# Altium PCB GCMProtoPCB.PcbDoc
Units mm, origin at the board's own origin, x right, y up, seen from the top; angles counter-clockwise.
Board outline 76 x 65.1 mm, 2 copper layers (Top Layer, Bottom Layer); 39 components, 40 nets, 181 pads, 40 vias.
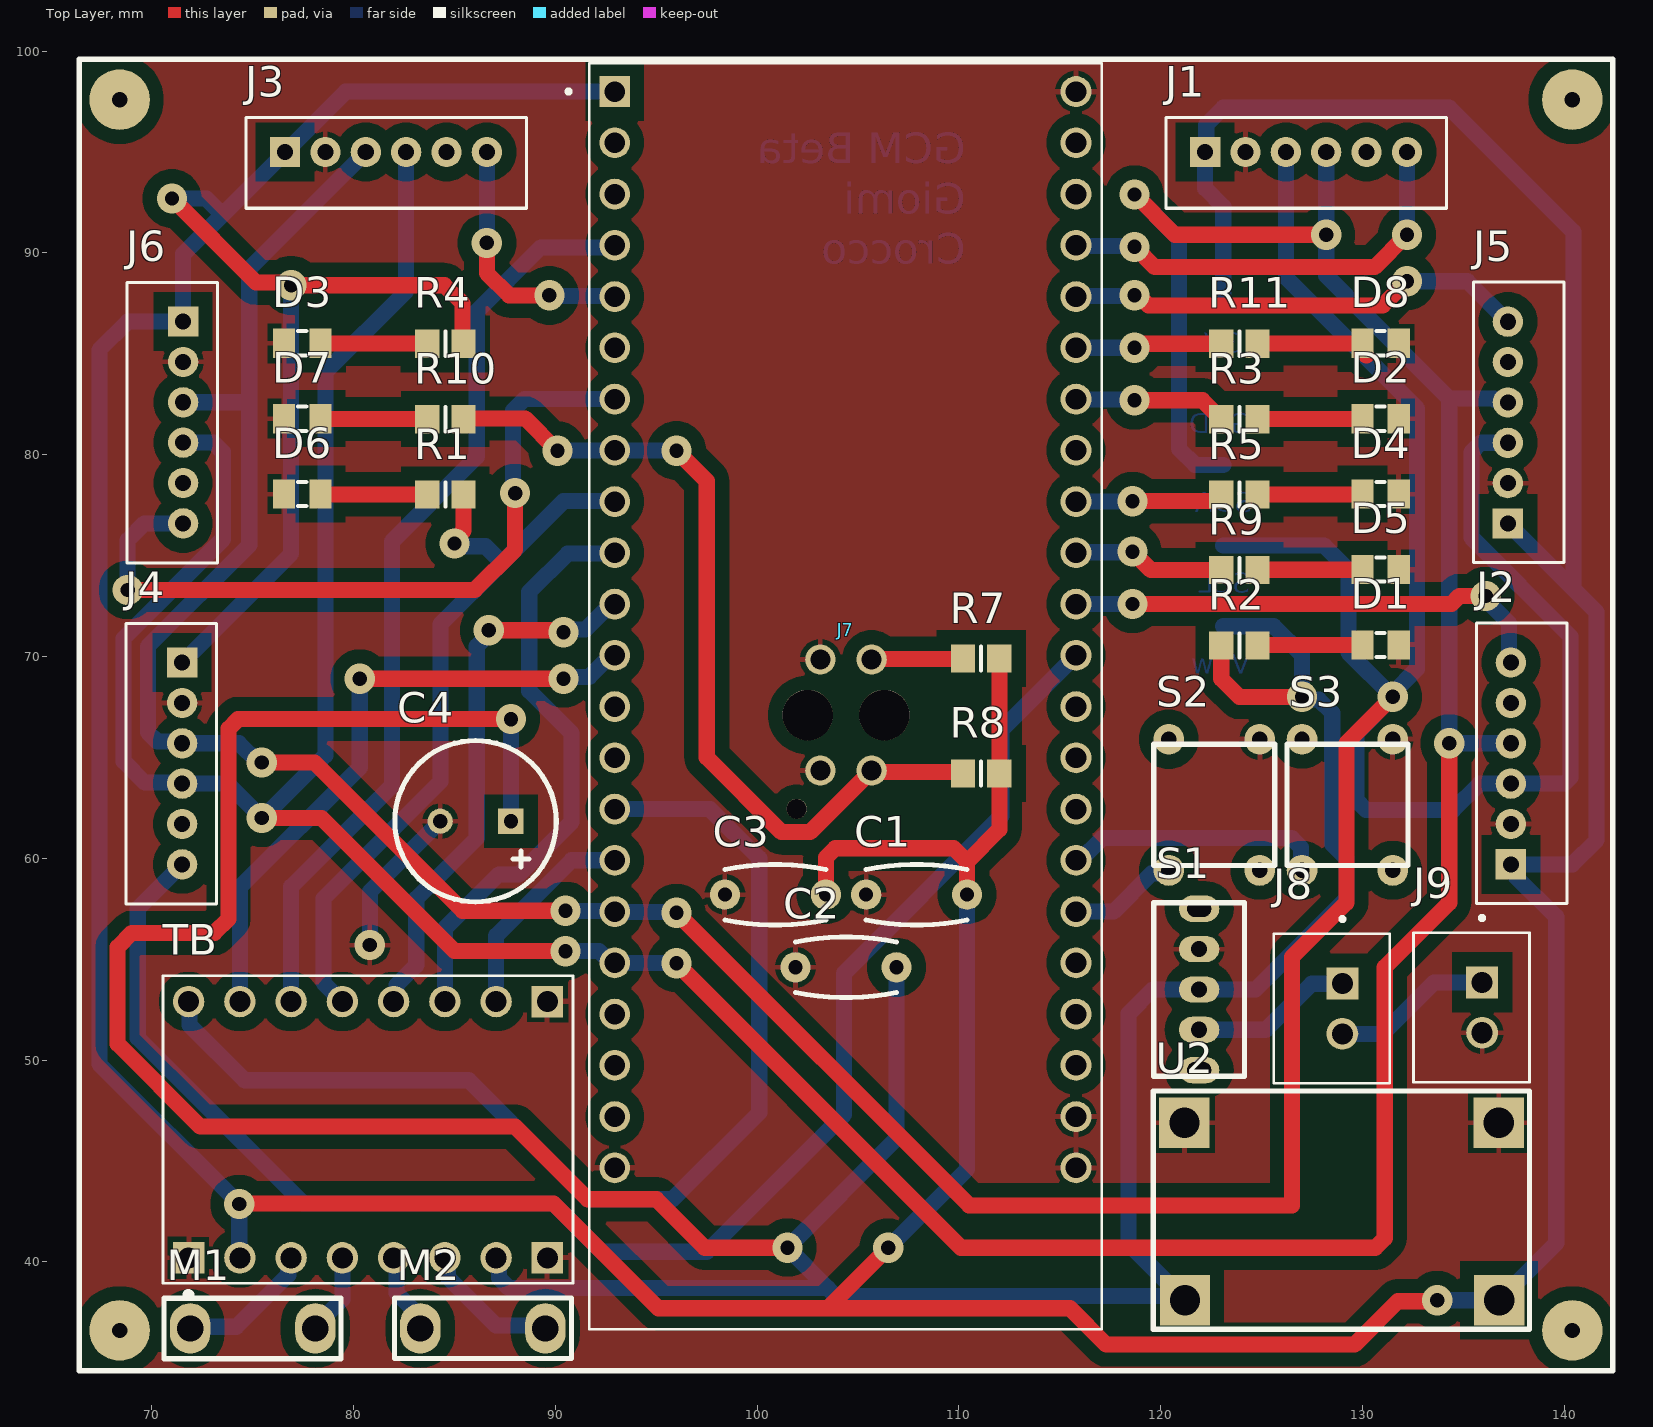
[diagram p0: Top Layer view]
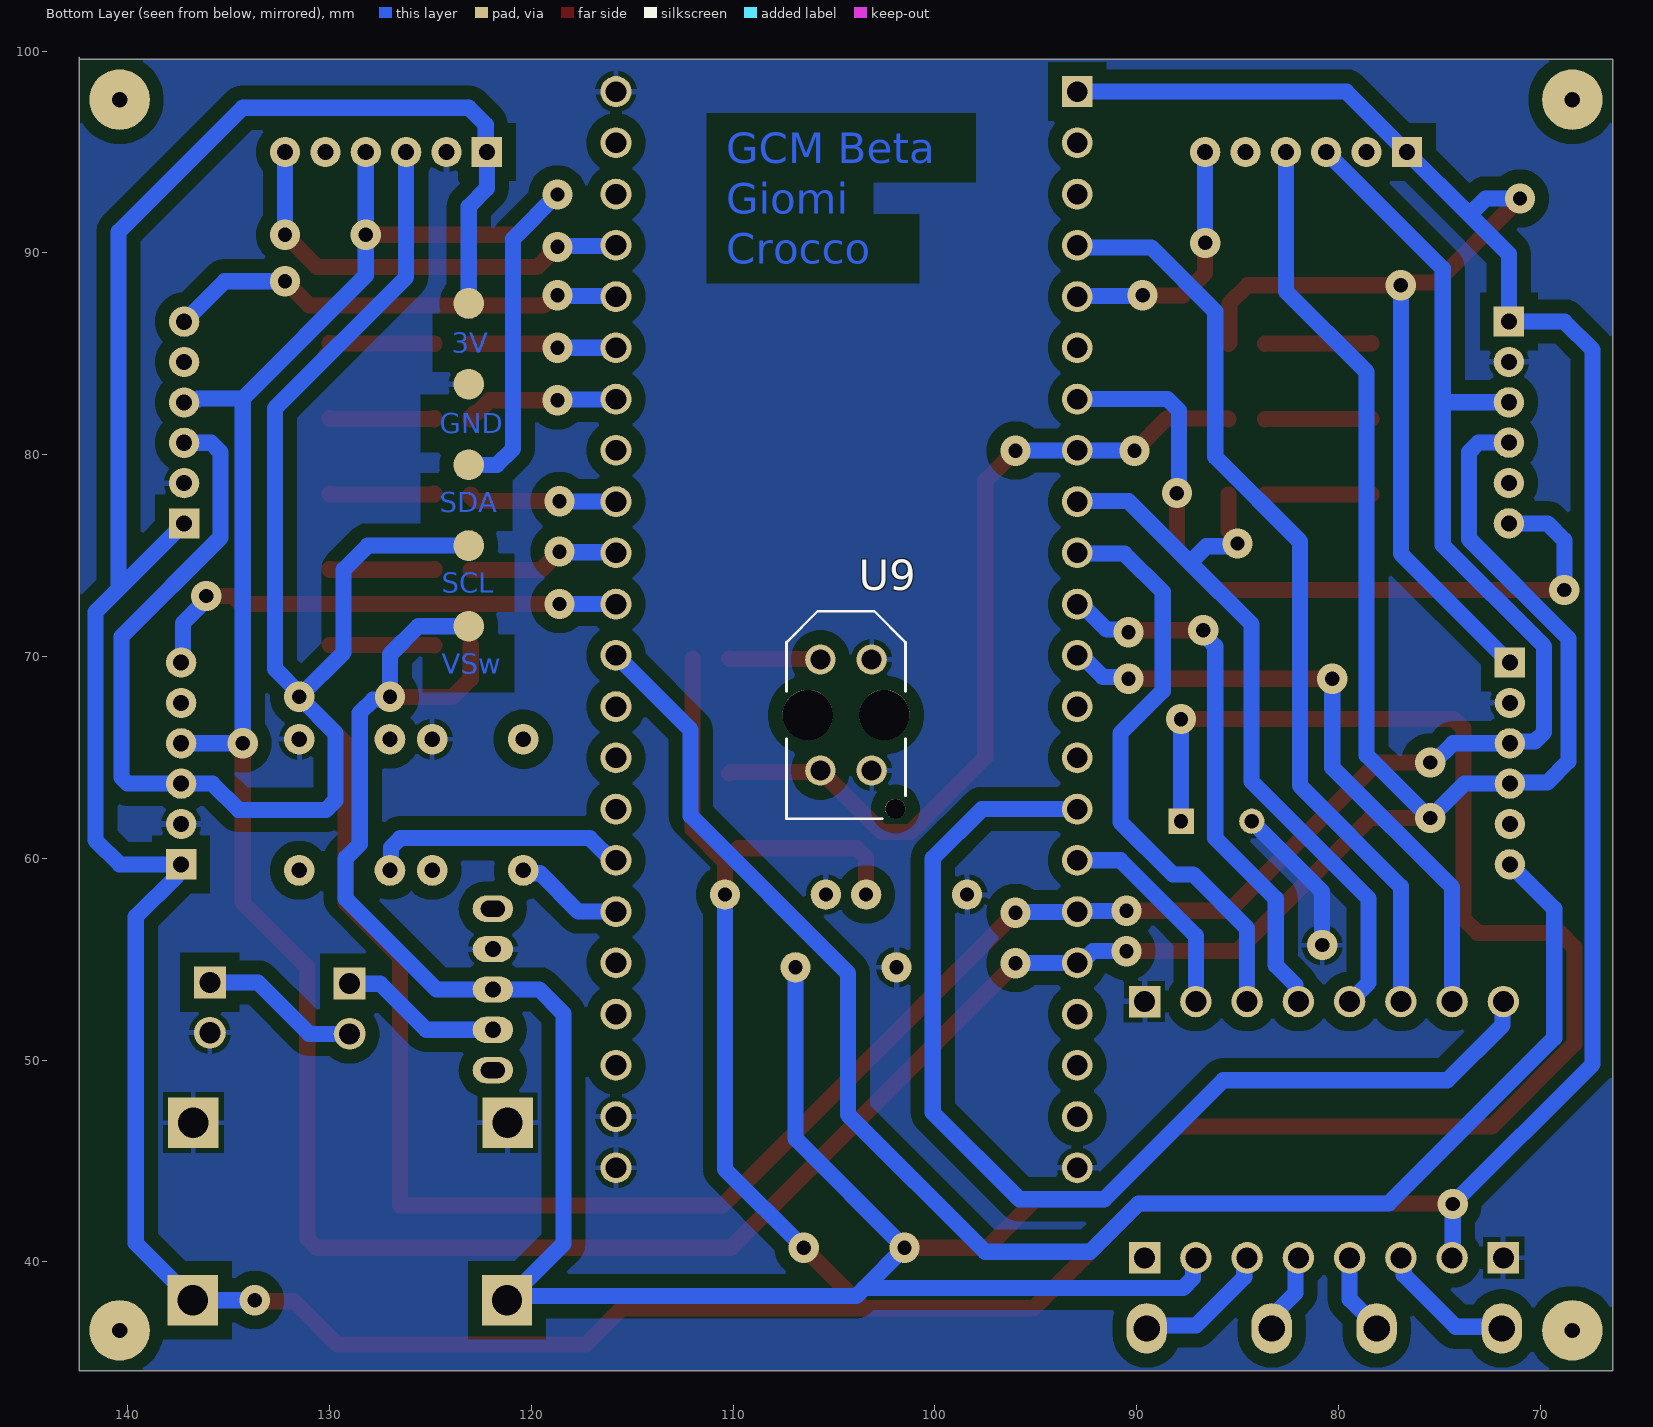
[diagram p1: Bottom Layer view, seen from below]

## Layer stack, top to bottom
Top Solder: solder mask 0.0102, Solder Resist, Dk 3.5
Top Layer: signal copper 0.0356
Dielectric 1: dielectric 0.32, FR-4, Dk 4.8
Bottom Layer: signal copper 0.0356
Bottom Solder: solder mask 0.0102, Solder Resist, Dk 3.5

## Board outline
66.4,34.6 142.4,34.6 142.4,34.7 142.4,99.7 142.4,99.6 66.4,99.6

## Design rules (kind name [scope] priority, off if disabled: settings)
Clearance Polygon [InPolygon] p1: gap=0.7 ignorepadtopadclearanceinfootprint=TRUE
Clearance [All] p2: gap=0.254 ignorepadtopadclearanceinfootprint=FALSE except(0: Arc-Hole Track-Hole SMDPad-Hole THPad-Hole Via-Hole Fill-Hole Poly-Hole Region-Hole Text-Hole)
PolygonConnect [All] p1: connectstyle=Relief reliefconductorwidth=0.254 reliefentries=4 polygonreliefangle="90 Angle" airgapwidth=0.254
RoutingVias [All] p1: holewidth=0.711 width=1.5 viastyle="Through Hole" minholewidth=0.711 minwidth=1.5 maxholewidth=0.711 maxwidth=1.5
SolderMaskExpansion [All] p1: expansion=0.102 istentingtop=FALSE
Width [All] p1: maxlimit=1 minlimit=0.7 preferedwidth=0.8
30 further rules are at their usual default settings.

## Components (designator, comment, footprint, x,y, rotation, side; value= is the part's Value field where it differs from the comment)
C1 "Cap Ceramico" "Cap Ceramico" 107.9,58.2 r0 top
C2 "100nf" "Cap Ceramico" 104.4,54.6 r180 top
C3 "Cap Ceramico" "Cap Ceramico" 100.9,58.2 r0 top
C4 "220 uF" "Cap El 220 uF" 86.3,61.947 r180 top
D1 "LED SMD" "LED SMD" 130.893,70.575 r180 top
D2 "LED SMD" "LED SMD" 130.893,81.787 r180 top
D3 "LED SMD" "LED SMD" 77.45,85.525 r0 top
D4 "LED SMD" "LED SMD" 130.893,78.05 r180 top
D5 "LED SMD" "LED SMD" 130.893,74.312 r180 top
D6 "LED SMD" "LED SMD" 77.45,78.05 r0 top
D7 "LED SMD" "LED SMD" 77.45,81.787 r0 top
D8 "LED SMD" "LED SMD" 130.893,85.525 r180 top
J1 "B6B-PH-K-S(LF)(SN)" JST_B6B-PH-K-S(LF)(SN) 127.2,94.45 r180 top
J2 "B6B-PH-K-S(LF)(SN)" JST_B6B-PH-K-S(LF)(SN) 137.9,64.7 r270 top
J3 "B6B-PH-K-S(LF)(SN)" JST_B6B-PH-K-S(LF)(SN) 81.6,94.45 r180 top
J4 "B6B-PH-K-S(LF)(SN)" JST_B6B-PH-K-S(LF)(SN) 70.95,64.7 r90 top
J5 "B6B-PH-K-S(LF)(SN)" JST_B6B-PH-K-S(LF)(SN) 137.75,81.594 r270 top
J6 "B6B-PH-K-S(LF)(SN)" JST_B6B-PH-K-S(LF)(SN) 71,81.6 r90 top
J7 "ESP32-S3-DEVKITC-1-N8R8" ESP32-S3-DEVKITC-1-N8R8 104.37,68.03 r0 top
J8 "B2B-XH-A" JST_B2B-XH-A 128.475,52.55 r90 top
J9 "B2B-XH-A" JST_B2B-XH-A 135.4,52.6 r90 top
M1 "" MOTOR 71.9,36.7 r0 top
M2 "" MOTOR 89.5,36.7 r180 top
R1 "150Ω" "RESISTENCIA SMD" 84.543,78.025 r180 top value=3KΩ
R2 "470Ω" "RESISTENCIA SMD" 123.9,70.55 r0 top value=3KΩ
R3 "150Ω" "RESISTENCIA SMD" 123.9,81.762 r0 top value=3KΩ
R4 "150Ω" "RESISTENCIA SMD" 84.543,85.5 r180 top value=3KΩ
R5 "150Ω" "RESISTENCIA SMD" 123.9,78.025 r0 top value=3KΩ
R7 "150Ω" "RESISTENCIA SMD" 111.1,69.9 r180 top value=3KΩ
R8 "3.3kΩ" "RESISTENCIA SMD" 111.1,64.2 r0 top value=3KΩ
R9 "150Ω" "RESISTENCIA SMD" 123.9,74.287 r0 top value=3KΩ
R10 "47Ω" "RESISTENCIA SMD" 84.543,81.763 r180 top value=3KΩ
R11 "150Ω" "RESISTENCIA SMD" 123.9,85.5 r0 top value=3KΩ
S1 "" "Slide Switch" 121.9,53.5 r90 top
S2 "" Pulsador 119.65,65.65 r90 top
S3 "" Pulsador 126.25,65.65 r90 top
TB "POLOLU-713" SHIELD_POLOLU-713 80.71,46.55 r90 top
U2 "Step-Down Mini360" Step-Down 128.668,42.5 r0 top
U9 "" OPTO_TCRT5000 104.4,67.1 r90 bottom

## Footprints (in the part's own frame and the unit in brackets; to place one, negate y for a bottom-side part, rotate by r counter-clockwise, add the part's x,y. Pads: shape width x height; smd on the part's side, far side on the other; paste and mask are expansions set on the pad)
"Cap Ceramico" [mm]
  round 1.5 hole 0.7: 1(-2.5,0) 2(2.5,0)
  silkscreen extent -2.5,-1.5 2.5,1.5
"Cap El 220 uF" [mm]
  rect 1.25x1.25 hole 0.7: 1(-1.49,0.11)
  round 1.25 hole 0.7: 2(2.01,0.11)
  silkscreen extent -3.74,-3.89 4.26,4.11, body extent -3.71,-3.95 4.29,4.05, height 1.27
ESP32-S3-DEVKITC-1-N8R8 [mm]
  rect 1.53x1.53 / inner round 1.53 / far side rect 1.53x1.53 hole 1.02: J1_1(-11.43,29.97)
  round 1.53 hole 1.02: J1_2(-11.43,27.43) J1_3(-11.43,24.89) J1_4(-11.43,22.35) J1_5(-11.43,19.81) J1_6(-11.43,17.27) J1_7(-11.43,14.73) J1_8(-11.43,12.19) J1_9(-11.43,9.65) J1_10(-11.43,7.11) J1_11(-11.43,4.57) J1_12(-11.43,2.03) J1_13(-11.43,-0.51) J1_14(-11.43,-3.05) J1_15(-11.43,-5.59) J1_16(-11.43,-8.13) J1_17(-11.43,-10.67) J1_18(-11.43,-13.21) J1_19(-11.43,-15.75) J1_20(-11.43,-18.29) J1_21(-11.43,-20.83) J1_22(-11.43,-23.37) J3_1(11.43,29.97) J3_2(11.43,27.43) J3_3(11.43,24.89) J3_4(11.43,22.35) J3_5(11.43,19.81) J3_6(11.43,17.27) J3_7(11.43,14.73) J3_8(11.43,12.19) J3_9(11.43,9.65) J3_10(11.43,7.11) J3_11(11.43,4.57) J3_12(11.43,2.03) J3_13(11.43,-0.51) J3_14(11.43,-3.05) J3_15(11.43,-5.59) J3_16(11.43,-8.13) J3_17(11.43,-10.67) J3_18(11.43,-13.21) J3_19(11.43,-15.75) J3_20(11.43,-18.29) J3_21(11.43,-20.83) J3_22(11.43,-23.37)
  silkscreen extent -13.82,-31.37 12.7,31.37, body extent -12.7,-31.96 12.7,37.68, height 7.39
JST_B2B-XH-A [mm]
  rect 1.575x1.575 / inner round 1.575 / far side rect 1.575x1.575 hole 1.05: 1(1.25,-0.525)
  round 1.575 hole 1.05: 2(-1.25,-0.525)
  silkscreen extent -3.7,-2.88 4.54,2.88
JST_B6B-PH-K-S(LF)(SN) [mm]
  rect 1.5x1.5 hole 0.8: 1(5,-0.55)
  round 1.5 hole 0.8: 2(3,-0.55) 3(1,-0.55) 4(-1,-0.55) 5(-3,-0.55) 6(-5,-0.55)
  silkscreen extent -6.96,-2.26 6.93,2.24, body extent -6.95,-2.25 6.95,2.25, height 6
"LED SMD" [mm] "0805"
  rect 1.1x1.45 smd: A(0.9,0) C(-0.9,0)
  silkscreen extent -0.2,-0.6 0.2,0.6, body extent -0.95,-0.65 1.05,0.6, height 0.7
MOTOR [mm]
  oval 2x2.5 hole 1.3: +(0,0) -(6.2,0)
  silkscreen extent -1.3,-1.5 7.47,1.5, body extent -1,-1 7.2,1, height 6.78
OPTO_TCRT5000 [mm]
  round 1.5 hole 1: A(2.75,1.27) CATH(2.75,-1.27) COLL(-2.75,1.27) E(-2.75,-1.27)
  round 1 hole 1 unplated: ""(-4.65,-2.45)
  round 2.5 hole 2.5 unplated: ""(0,-1.9) ""(0,1.9)
  silkscreen extent -5.15,-2.95 5.15,2.95
Pulsador [mil]
  round 60 hole 30: 1(-246.06,-29.53) 2(9.84,-206.69) 3(9.84,-29.53) 4(-246.06,-206.69)
  silkscreen extent -236,-236 0,0
"RESISTENCIA SMD" [mm] "0805"
  rect 1.2x1.4 smd: 1(-0.9,0) 2(0.9,0)
  silkscreen extent 0,-0.6 0,0.6, body extent -1,-0.61 1,0.64, height 0.6
SHIELD_POLOLU-713 [mm]
  rect 1.56x1.56 hole 1.04: 1(-6.35,8.89) 8(-6.35,-8.89) 9(6.35,-8.89)
  round 1.56 hole 1.04: 2(-6.35,6.35) 3(-6.35,3.81) 4(-6.35,1.27) 5(-6.35,-1.27) 6(-6.35,-3.81) 7(-6.35,-6.35) 10(6.35,-6.35) 11(6.35,-3.81) 12(6.35,-1.27) 13(6.35,1.27) 14(6.35,3.81) 15(6.35,6.35) 16(6.35,8.89)
  silkscreen extent -8.35,-10.16 7.62,10.16
"Slide Switch" [mm]
  oval 1.3x2 hole 0.8: 0(-2,0) 1(0,0) 2(2,0)
  oval 1.3x2 hole 0.8 slot 1.2 at 90 deg: SH(-4,0) SH(4,0)
  silkscreen extent -4.3,-2.25 4.3,2.25, body extent -4.28,-1.92 4.31,1.85, height 6.34
Step-Down [mm]
  rect 2.5x2.5 hole 1.5 mask+0: 1(-7.468,-4.4) 2(-7.493,4.4) 3(8.103,-4.4) 4(8.077,4.4)
  silkscreen extent -9.04,-5.84 9.6,5.97, body extent -8.2,-5.56 8.8,5.74, height 4

## Part data
C2: library part "Cap Ceramico"
C4: library part "CAP EL 220 uF"
D1 D2 D3 D4 D5 D6 D7 D8: "0805", Package=None, Availability=Unavailable, MP=597-5311-402F, Price=None
J1 J2 J3 J4 J5 J6: LCSC Part Number=C131342, Package=None, Availability=Unavailable, MF="{'manufacturer': u'JST Sales America Inc.'}", MP=B6B-PH-K-S(LF)(SN), Price=None
J7: "The ESP32-S3-DEVKITC-1-N8R8 from Espressif Systems is a development board designed for RF, RFID, and wireless applications. It supports 802.11 b/g/n Wi-Fi and BluetoothÂ® 5.x (BLE) connectivity at 2.4GHz, making it ideal for IoT and wireless communication", Package=None, Check_prices=https://www.snapeda.com/parts/ESP32-S3-DEVKITC-1-N8R8/Espressif+Systems/view-part/?ref=eda, MF="Espressif Systems", MP=ESP32-S3-DEVKITC-1-N8R8, SnapEDA_Link=https://www.snapeda.com/parts/ESP32-S3-DEVKITC-1-N8R8/Espressif+Systems/view-part/?ref=snap
J8 J9: Package=None, Availability=Unavailable, MF="{'manufacturer': u'JST Sales America Inc.'}", MP=B2B-XH-A, Price=None
M1 M2: library part POLOLU, LatestRevisionDate=17-Jul-2002, LatestRevisionNote="Re-released for DXP Platform.", Publisher="Altium Limited"
R1 R2 R3 R4 R5 R7 R8 R9 R10 R11: library part RESISTENCIA, "0805", LatestRevisionDate=17-Jul-2002, LatestRevisionNote="Re-released for DXP Platform.", PackageDescription="Axial Device, Thru-Hole; 2 Leads; 0.3 in Pin Spacing", PackageReference=AXIAL-0.3, Published=8-Jun-2000, Publisher="Altium Limited"
S1: library part "SLIDE SWITCH"
S2 S3: library part Pulador
TB: "DC-motor driver; IC: TB6612FNG; 100kHz; 1A; Uin mot: 4.5", Package=None, Availability=Unavailable, MF=Pololu, MP=POLOLU-713, Price=None, SnapEDA_Link=https://www.snapeda.com/parts/POLOLU-713/Pololu/view-part/53073/?ref=snap
U2: library part Step-Down
U9: library part TCRT5000, "950 nm 60 mA Through Hole Reflective Optical Sensor with Transistor Output", Package=None, Availability=Unavailable, MP=TCRT5000, Price=None

## Free pads (board coordinates)
  round 1.524 smd far side: 2(123.1,71.5) 2(123.1,75.5) 2(123.1,79.5) 2(123.1,83.5) 2(123.1,87.5)
  round 3 hole 0.762: 3(68.4,97.6) 4(68.4,36.6) 5(140.4,36.6) 6(140.4,97.6)

## Via types
v1: diameter 1.5, hole 0.711, Top Layer to Bottom Layer, 40 vias

## Nets (pads, with @x,y where several pads share a name; then routed paths per layer and width w, separated by ;. In a path a pad name is that pad's centre, name@x,y a point inside that pad or via, vN(x,y) a via of type N, cw(c..) or ccw(c..) an arc to the next point about the centre after c; other vN are vias at no path point)
+3.3V: C1.2 C3.2 J1.1 J2.1 J3.1 J4.1 J5.1 J6.1 J7.J1_1 pad.2@123.1,87.5 R4.1 R7.1 R8.2 TB.2 U2.3 | length 328.5
  Top Layer w0.8: v1(71,92.7) 75.166,88.534 76.766,88.534 v1(76.9,88.4) 84.5,88.4 85.4,87.5 85.4,85.543 R4.1 ; v1(74.33,42.87) 74.36,42.9 89.9,42.9 95.1,37.7 103.5,37.7 ; C3.2 103.4,60.031 103.869,60.5 109.731,60.5 110.4,59.831 ; v1(106.5,40.7) 103.5,37.7 ; C1.2 110.4,59.831 ; R7.1 R8.2 112,61.431 110.4,59.831 ; v1(133.7,38.1) 133.65,38.05 131.75,38.05 129.6,35.9 117.3,35.9 115.5,37.7 103.5,37.7
  Bottom Layer w0.8: v1(71,92.7) 72.7,92.7 73.5,91.9 ; J4.1 76.9,75.1 v1(76.9,88.4) ; TB.2 74.33,40.23 v1(74.33,42.87) 67.4,49.8 67.4,85.2 68.8,86.6 J6.1 71.55,89.95 73.5,91.9 ; J7.J1_1 79.6,98 J3.1 73.5,91.9 ; v1(106.5,40.7) 110.4,44.6 110.4,58.1 110.5,58.2 C1.2 ; pad.2@123.1,87.5 123.1,92.3 122.2,93.2 J1.1 122.253,95.053 122.253,96.353 123.1,97.2 134.3,97.2 140.45,91.05 140.45,73.35 ; v1(133.7,38.1) U2.3 139.6,40.93 139.6,57.1 137.554,59.146 137.554,59.446 J2.1@137.3,59.7 ; J5.1@137.2,76.6 140.45,73.35 ; J2.1 140.4,59.7 141.6,60.9 141.6,72.2 140.45,73.35
+7.4V: J8.1 S1.0 | length 8.1
  Bottom Layer w0.8: S1.0 125.2,51.5 127.481,53.781 128.981,53.781 J8.1
AIN1: J7.J1_4 TB.14 | length 46.2
  Bottom Layer w0.8: TB.14 76.9,58.6 81.9,63.6 81.9,75.7 86.1,79.9 86.1,87.1 89.275,90.275 92.835,90.275 J7.J1_4
AIN2: J7.J1_12 TB.15 | length 31.6
  Top Layer w0.8: v1(80.3,68.9) v1(90.4,68.9)
  Bottom Layer w0.8: TB.15 74.36,58.56 80.3,64.5 v1(80.3,68.9) ; v1(90.4,68.9) 90.49,68.99 91.672,68.99 92.742,70.06 J7.J1_12
BIN1: J7.J1_11 TB.12 | length 27.2
  Top Layer w0.8: v1(86.7,71.3) 90.3,71.3 v1(90.4,71.2)
  Bottom Layer w0.8: TB.12 82.125,53.045 82.125,53.725 83.1,54.7 83.1,58 86.1,61 86.1,70.511 86.7,71.111 v1(86.7,71.3) ; v1(90.4,71.2) 90.534,71.334 91.476,71.334 92.742,72.6 J7.J1_11
BIN2: J7.J1_10 TB.11 | length 29.4
  Bottom Layer w0.8: TB.11 84.52,56.52 87.2,59.2 88.2,59.2 90.8,61.8 90.8,66.2 88.7,68.3 88.7,73.2 90.6,75.1 92.9,75.1 J7.J1_10
CLR: J7.J3_16 S3.1 | length 13
  Bottom Layer w0.8: J7.J3_16 115.998,59.9 117.098,61 126.488,61 126.957,60.531 126.957,59.443 S3.1
DBL: J7.J3_7 R3.1 | length 7.7
  Top Layer w0.8: v1(118.7,82.7) 122.062,82.7 122.7,82.062 122.8,82.062 123,81.862 R3.1
  Bottom Layer w0.8: J7.J3_7 115.83,82.73 118.67,82.73 v1(118.7,82.7)
GND: C1.1 C2.2 C3.1 C4.2 D1.C D2.C D3.C D4.C D5.C D6.C D7.C D8.C J1.2 J2.2 J3.2 J4.2 J5.2 J6.2 J7.J1_22 J7.J3_1 J7.J3_21 J7.J3_22 J9.2 pad.2@123.1,83.5 S1.2 S2.2 S3.2 TB.1 TB.8 TB.9 U2.2 U2.4 U9.CATH U9.E | length 7.6
  Bottom Layer w0.8: v1(80.8,55.7) 80.803,55.703 80.803,58.35 C4.2
"IR Signal": J7.J1_8 R8.1 R10.1 U9.COLL | length 42.6
  Top Layer w0.8: R10.1 85.481,81.8 88.5,81.8 v1(90.1,80.2) ; v1(96,80.2) 97.5,78.7 97.5,65 101.204,61.296 102.616,61.296 U9.COLL 105.745,64.275 110.125,64.275 R8.1
  Bottom Layer w0.8: v1(90.1,80.2) 90.11,80.21 92.93,80.21 J7.J1_8 92.95,80.21 95.99,80.21 v1(96,80.2)
MNTD: J7.J3_10 R9.1 | length 7.6
  Top Layer w0.8: v1(118.6,75.2) 119.513,74.287 R9.1
  Bottom Layer w0.8: J7.J3_10 115.83,75.17 118.57,75.17 v1(118.6,75.2)
MODE: J7.J3_6 R11.1 | length 7.3
  Top Layer w0.8: v1(118.7,85.3) 118.889,85.3 119.089,85.5 R11.1
  Bottom Layer w0.8: J7.J3_6 v1(118.7,85.3)
NetD1_A: D1.A R2.2 | length 5.2
  Top Layer w0.8: R2.2 124.812,70.562 129.981,70.562 D1.A
NetD2_A: D2.A R3.2 | length 5.2
  Top Layer w0.8: R3.2 124.812,81.775 129.981,81.775 D2.A ; R3.2@124.8,81.807 R3.2@124.812,81.819 ; D2.A@129.981,81.807 D2.A@129.993,81.819
NetD3_A: D3.A R4.2 | length 5.3
  Top Layer w0.8: D3.A 78.363,85.512 83.631,85.512 R4.2
NetD4_A: D4.A R5.2 | length 5.2
  Top Layer w0.8: R5.2 124.812,78.037 129.981,78.037 D4.A ; R5.2@124.8,78.069 R5.2@124.812,78.082 ; D4.A@129.981,78.069 D4.A@129.993,78.082
NetD5_A: D5.A R9.2 | length 5.2
  Top Layer w0.8: R9.2 124.812,74.3 129.981,74.3 D5.A ; R9.2@124.8,74.344 R9.2@124.813,74.332 ; D5.A@129.981,74.344 D5.A@129.993,74.332
NetD6_A: D6.A R1.2 | length 5.3
  Top Layer w0.8: D6.A 78.363,78.037 83.631,78.037 R1.2
NetD7_A: D7.A R10.2 | length 5.3
  Top Layer w0.8: D7.A 78.363,81.775 83.631,81.775 R10.2
NetD8_A: D8.A R11.2 | length 5.2
  Top Layer w0.8: R11.2 124.812,85.512 129.981,85.512 D8.A ; D8.A@130.181,84.913 D8.A@130.193,84.925
NetJ8_2: J8.2 J9.1 | length 8
  Bottom Layer w0.8: J8.2 131,51.3 133.55,53.85 J9.1
NetM1_+: M1.+ TB.3 | length 7
  Bottom Layer w0.8: M1.+@71.8,36.7 71.881,36.781 74.181,36.781 76.755,39.355 76.755,40.055 TB.3
NetM1_-: M1.- TB.4 | length 4.1
  Bottom Layer w0.8: M1.-@78,36.7 79.44,38.14 TB.4
NetM2_+: M2.+ TB.6 | length 6.9
  Bottom Layer w0.8: TB.6 84.665,40.055 84.665,39.235 87.059,36.841 89.359,36.841 M2.+
NetM2_-: M2.- TB.5 | length 4
  Bottom Layer w0.8: TB.5 82.125,40.055 82.125,38.449 83.3,37.275 M2.-
NetR7_2: R7.2 U9.A | length 4.6
  Top Layer w0.8: U9.A 105.695,69.875 110.175,69.875 R7.2
PWMA: J7.J1_15 TB.16 | length 55.5
  Bottom Layer w0.8: TB.16 71.86,52.86 71.86,51.74 74.6,49 85.7,49 91.6,43.1 95.8,43.1 100.1,47.4 100.1,60 97.66,62.44 J7.J1_15
PWMB: J7.J1_16 TB.10 | length 10.7
  Bottom Layer w0.8: TB.10 87.06,56.16 90.8,59.9 J7.J1_16
SCL: J1.3 J2.3 J3.3 J4.3 J5.3 J6.3 J7.J1_17 pad.2@123.1,75.5 | length 211.8
  Top Layer w0.8: v1(75.45,64.75) 78.05,64.75 85.4,57.4 v1(90.5,57.4) ; v1(96,57.3) 110.5,42.8 126.5,42.8 126.5,55.1 129.2,57.8 129.2,65.7 v1(131.5,68)
  Bottom Layer w0.8: J6.3 74.825,82.6 ; v1(75.45,64.75) 75.261,64.75 74.311,65.7 J4.3 71.412,65.788 70.269,65.788 69.8,66.256 69.8,70.5 74.825,75.525 74.825,82.6 ; J3.3 74.825,89.225 74.825,82.6 ; v1(90.5,57.4) 90.52,57.38 92.92,57.38 J7.J1_17 92.97,57.33 95.97,57.33 v1(96,57.3) ; pad.2@123.1,75.5 128.1,75.5 129.3,74.3 129.3,70.2 v1(131.5,68) ; J1.3 126.2,88.8 132.7,82.3 132.7,69.389 131.5,68.189 v1(131.5,68) ; J5.3 135.869,80.594 135.4,80.125 135.4,75.9 140.3,71 140.3,64 140,63.7 J2.3 135.8,63.7 134.5,62.4 130.169,62.4 129.7,62.869 129.7,66.2 v1(131.5,68)
SDA: J1.4 J2.4 J3.4 J4.4 J5.4 J6.4 J7.J1_18 pad.2@123.1,79.5 | length 218.2
  Top Layer w0.8: v1(75.45,62) 78.4,62 85,55.4 v1(90.5,55.4) ; v1(96,54.8) 110.1,40.7 130.631,40.7 131.1,41.169 131.1,54.6 134.3,57.8 v1(134.3,65.7) ; v1(118.7,92.9) 120.7,90.9 v1(128.2,90.9)
  Bottom Layer w0.8: J6.4 73.056,80.6 73.525,80.131 73.525,75.825 68.6,70.9 68.6,64.8 69.646,63.754 71.446,63.754 J4.4 73.75,63.7 v1(75.45,62) ; v1@75.5,62 78.6,65.1 78.6,84.1 82.6,88.1 J3.4 ; v1(90.5,55.4) 92.162,55.4 92.752,54.81 95.99,54.81 v1(96,54.8) ; v1(118.7,92.9) 120.9,90.7 120.9,80.3 121.7,79.5 pad.2@123.1,79.5 ; J1.4 v1(128.2,90.9) 128.2,88.885 134.3,82.785 ; J5.4 137.066,82.728 136.571,82.728 136.514,82.785 134.3,82.785 ; J2.4 v1(134.3,65.7) 134.3,82.785
START: J7.J3_17 S2.1 | length 5.4
  Bottom Layer w0.8: J7.J3_17 117.66,57.36 119.561,59.261 120.261,59.261 S2.1
STBY: J7.J1_9 R1.1 TB.13 | length 38
  Top Layer w0.8: v1(85,75.6) 85,75.789 85.443,76.233 R1.1
  Bottom Layer w0.8: TB.13 78.5,53.84 78.5,58 84.3,63.8 84.3,71.6 87.35,74.65 ; v1(85,75.6) 85.134,75.466 86.534,75.466 87.35,74.65 ; J7.J1_9 92.92,77.7 90.4,77.7 87.35,74.65
TEST: J7.J3_9 R5.1 | length 7.4
  Top Layer w0.8: v1(118.6,77.7) 122.675,77.7 122.7,77.725 122.8,77.725 123,77.925 R5.1
  Bottom Layer w0.8: J7.J3_9 115.81,77.69 118.59,77.69 v1(118.6,77.7)
VSwitch: C2.1 C4.1 pad.2@123.1,71.5 R2.1 S1.1 TB.7 U2.1 | length 183.9
  Top Layer w0.8: v1(87.8,66.9) 74.269,66.9 73.8,66.431 73.8,57 73.1,56.3 69,56.3 68.3,55.6 68.3,50.8 72.4,46.7 88,46.7 91.6,43.1 95,43.1 97.4,40.7 v1(101.5,40.7) ; R2.1 123,68.9 123.9,68 v1(127,68)
  Bottom Layer w0.8: TB.7 87.205,40.055 87.205,39.192 87.697,38.7 103.5,38.7 ; C4.1 87.795,61.842 87.795,66.895 v1(87.8,66.9) ; C2.1 106.9,46.1 v1(101.5,40.7) 103.5,38.7 ; pad.2@123.1,71.5 125.6,71.5 127,70.1 v1(127,68) 127.134,67.866 127.839,67.866 128.5,67.205 128.5,60.7 129.2,60 129.2,58 124.7,53.5 S1.1 119.6,53.5 118.4,52.3 118.4,40.9 U2.1 121,38.3 103.9,38.3 103.5,38.7
XSHUT1: J1.6 J7.J3_4 | length 21.6
  Top Layer w0.8: v1(118.7,90.3) 119.7,89.3 130.6,89.3 v1(132.2,90.9)
  Bottom Layer w0.8: J7.J3_4 115.84,90.34 118.66,90.34 v1(118.7,90.3) ; v1(132.2,90.9) J1.6
XSHUT2: J3.6 J7.J1_5 | length 12.8
  Top Layer w0.8: v1(86.6,90.5) 86.6,89 87.7,87.9 v1(89.7,87.9)
  Bottom Layer w0.8: v1(86.6,90.5) J3.6 ; v1(89.7,87.9) 89.73,87.87 92.91,87.87 J7.J1_5
XSHUT3: J5.6 J7.J3_5 | length 23
  Top Layer w0.8: v1(118.7,87.9) 118.889,87.9 119.389,87.4 131,87.4 v1(132.2,88.6)
  Bottom Layer w0.8: J7.J3_5 115.83,87.87 118.67,87.87 v1(118.7,87.9) ; v1(132.2,88.6) 135.194,88.6 J5.6
XSHUT4: J2.6 J7.J3_11 | length 24.3
  Top Layer w0.8: v1(118.6,72.6) 134.4,72.6 134.8,73 v1(136.1,73)
  Bottom Layer w0.8: J7.J3_11 v1(118.6,72.6) ; v1(136.1,73) 136.1,72.811 137.261,71.65 137.261,69.789 J2.6
XSHUT5: J4.6 J7.J3_12 | length 79.2
  Bottom Layer w0.8: J4.6 69.3,57.5 69.3,51.1 77.5,42.9 89.9,42.9 92.3,40.5 97.5,40.5 104.3,47.3 104.3,54.3 112.1,62.1 112.1,66.36 J7.J3_12
XSHUT6: J6.6 J7.J1_7 | length 37.8
  Top Layer w0.8: v1(68.804,73.3) 86,73.3 88,75.3 v1(88,78.1)
  Bottom Layer w0.8: v1(68.804,73.3) 68.8,73.304 68.8,75.765 69.635,76.6 J6.6@71.5,76.6 ; v1(88,78.1) 87.9,78.2 87.9,82.2 88.46,82.76 J7.J1_7
pads on no net: J1.5 J2.5 J3.5 J4.5 J5.5 J6.5 J7.J1_2 J7.J1_3 J7.J1_6 J7.J1_13 J7.J1_14 J7.J1_19 J7.J1_20 J7.J1_21 J7.J3_2 J7.J3_3 J7.J3_8 J7.J3_13 J7.J3_14 J7.J3_15 J7.J3_18 J7.J3_19 J7.J3_20 S1.SH S2.3 S2.4 S3.3 S3.4 U9.

## Polygon pours and split planes (outlines as drawn)
GND on Top Layer "GND_L01_P001" (solid, remove dead copper, pour order 1): 66.4,99.6 142.4,99.6 142.4,34.6 66.4,34.6
GND on Bottom Layer "GND_L02_P002" (solid, remove dead copper, pour order 2): 66.4,99.6 142.4,99.6 142.4,34.6 66.4,34.6

## Other copper
Bottom Layer:
  text "GCM Beta" at 110.346,94.454 h1.52
  text "Giomi" at 110.346,91.954 h1.52
  text "Crocco" at 110.346,89.454 h1.52
  text "3V" at 123.946,85.054 h1
  text "GND" at 124.546,81.054 h1
  text "SDA" at 124.546,77.154 h1
  text "SCL" at 124.446,73.154 h1
  text "VSw" at 124.446,69.154 h1

## Silkscreen, mask and mechanical layers (free items; w line width, h text height)
Top Overlay:
  lines w0.254: 66.4,34.6 66.4,99.6 142.4,99.6 142.4,34.6 66.4,34.6